# Altium PCB Analog_mic_breakout_rev2.PcbDoc
Units mm, origin at the board's own origin, x right, y up, seen from the top; angles counter-clockwise.
Board outline 4.11 x 9 mm, 2 copper layers (Top Layer, Bottom Layer); 6 components, 4 nets, 15 pads, 3 vias.
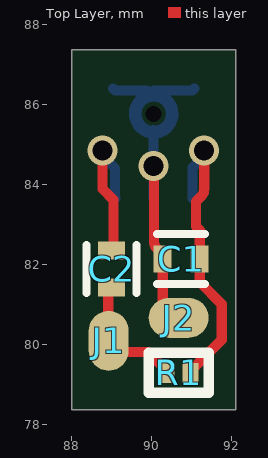
[diagram p0: Top Layer view]
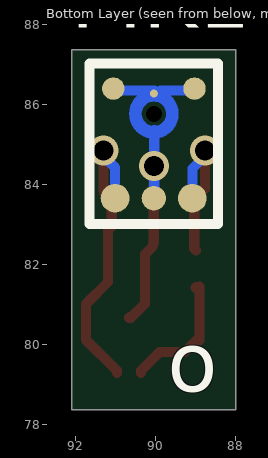
[diagram p1: Bottom Layer view, seen from below]
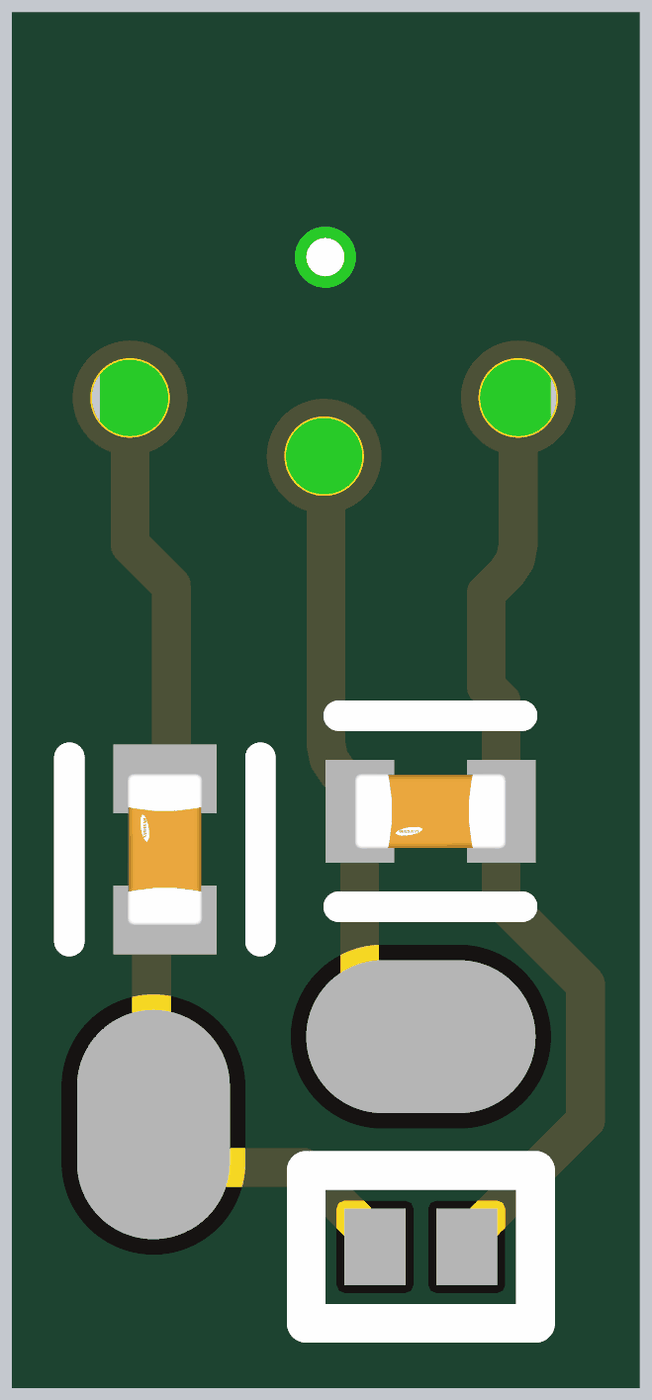
[diagram p2: 3D render of the assembled board from above, using the file's embedded part models]

## Layer stack, top to bottom
Top Solder: solder mask 0.0102, Solder Resist, Dk 3.5
Top Layer: signal copper 0.0356
Dielectric 1: dielectric 0.32, FR-4, Dk 4.8
Bottom Layer: signal copper 0.0356
Bottom Solder: solder mask 0.0102, Solder Resist, Dk 3.5

## Board outline
88.001,78.357 92.106,78.357 92.106,87.359 88.001,87.359

## Design rules (kind name [scope] priority, off if disabled: settings)
Clearance [All] p1: gap=0.254 ignorepadtopadclearanceinfootprint=FALSE except(0: Arc-Hole Track-Hole SMDPad-Hole THPad-Hole Via-Hole Fill-Hole Poly-Hole Region-Hole Text-Hole)
PolygonConnect [All] p1: connectstyle=Relief reliefconductorwidth=0.254 reliefentries=4 polygonreliefangle="90 Angle" airgapwidth=0.254
RoutingVias [All] p1: holewidth=0.711 width=1.27 viastyle="Through Hole" minholewidth=0.711 minwidth=1.27 maxholewidth=0.711 maxwidth=1.27
SolderMaskExpansion [All] p1: expansion=0.102 istentingtop=FALSE
Width [All] p1: maxlimit=0.254 minlimit=0.254 preferedwidth=0.254
30 further rules are at their usual default settings.

## Components (designator, comment, footprint, x,y, rotation, side; value= is the part's Value field where it differs from the comment)
C1 "CL05A106MP5NUNC" FP-CL05A106MP5NUNC-MFG 90.739,82.132 r180 top value=10uF
C2 "CL05A106MP5NUNC" FP-CL05A106MP5NUNC-MFG 89.001,81.882 r90 top value=10uF
J1 "Pad" Pad 88.926,80.082 r0 top
J2 "Pad" Pad 90.676,80.657 r270 top
MK1 "AMM-3738-B-R" 665-AMM-3738-B-R 90.051,85.757 r180 bottom
R1 "ERA-1AEB102C" 0603_SMD_Resistor 90.676,79.282 r0 top

## Footprints (in the part's own frame and the unit in brackets; to place one, negate y for a bottom-side part, rotate by r counter-clockwise, add the part's x,y. Pads: shape width x height; smd on the part's side, far side on the other; paste and mask are expansions set on the pad)
0603_SMD_Resistor [mm]
  rect 0.4x0.5 smd mask+0.052: 1(-0.3,0) 2(0.3,0)
  silkscreen extent -0.75,-0.5 0.75,0.5, body extent -0.34,-0.17 0.34,0.17, height 0.32
665-AMM-3738-B-R [mm] "Analog MEMS Microphone"
  round 0.72 smd: 1(0.96,-2.11) 4(-0.97,-2.11)
  round 0.56 smd mask+0.102: 2(1.015,0.63)
  round 0.56 smd: 3(-1.015,0.63)
  round 0.61 smd: 5(0,-2.11)
  round 0.2 smd: 6(0,0.508)
  Top Layer lines w0.315: 0.008,-0.462 cw(c0,0) -0.463,0 cw(c0,0) 0.008,-0.462
  silkscreen extent -1.61,-2.76 1.61,1.25, body extent -1.48,-2.63 1.47,1.13, height 1.11
FP-CL05A106MP5NUNC-MFG [mm]
  rect 0.45x0.675 smd paste+0 mask+0: 1(-0.463,0) 2(0.463,0)
  silkscreen extent -0.6,-0.63 0.6,0.63, body extent -0.79,-0.45 0.79,0.45, height 0.25
Pad [mm]
  oval 1x1.5 smd: 1(0,0)

## Part data
C1 C2: library part CMP-13271-000002-1, "CAP CER 10UF 10V X5R 0402", Capacitance=10uF, Manufacturer=Samsung, Temperature="-55°C to +85°C", Temperature Characteristic=X5R, Temperature Coefficient=15%, Temperature Range High=+85°C, Temperature Range Low=-55°C, Tolerance=20%, Voltage Rating=10V, Automotive=No, Category=Cap, ComponentLink2Description=Datasheet, ComponentLink2URL=http://www.samsungsem.com/kr/support/product-search/mlcc/__icsFiles/afieldfile/2019/05/10/19-CL05A106MP5NUNC.pdf, Device Class L1="Passive Components", Device Class L2=Capacitors, Device Class L3="Ceramic Capacitors", Digikey Description="CAP CER 10UF 10V X5R 0402", Height=0.7mm, Ipc Land Pattern Name=CAPC10050X50, Lead Free=Yes, Manufacturer Part Number=CL05A106MP5NUNC, Material=Ceramic, Octopart=https://octopart.com/cl05a106mp5nunc-samsung-22457395, Package=CL05A106MP5NUNC, RoHS=TRUE
MK1: Manufacturer="PUI Audio", Supplier Part Number 1=665-AMM-3738-B-R, Supplier 1=Mouser
R1: "0603 SMD 1K Res 0.1%", Supplier Part Number 1=P1.0KBXCT-ND, Supplier 1=Digi-Key

## Free pads (board coordinates)
  round 0.1 hole 0.4 unplated: 13(90.051,85.757)

## Via types
v1: diameter 0.75, hole 0.5, Top Layer to Bottom Layer, tented top, 3 vias

## Nets (pads, with @x,y where several pads share a name; then routed paths per layer and width w, separated by ;. In a path a pad name is that pad's centre, name@x,y a point inside that pad or via, vN(x,y) a via of type N, cw(c..) or ccw(c..) an arc to the next point about the centre after c; other vN are vias at no path point)
GND: C1.2 J2.1 MK1.2 MK1.3 MK1.5 MK1.6 | length 7.7
  Top Layer w0.254: v1(90.043,84.455) 90.045,84.448 cw(c89.801,84.377) 90.055,84.377 90.055,82.571 ccw(c90.309,82.571) 90.129,82.391 90.276,82.244 C1.2 90.276,81.009 90.628,80.657 J2.1
  Bottom Layer w0.254: MK1.2 89.085,86.338 89.884,86.338 ; 90.043,85.344 90.043,85.295 v1(90.043,84.455) 90.043,83.655 MK1.5 ; MK1.6@90.043,86.338 91.017,86.338 MK1.3
NetC1_1: C1.1 MK1.4 R1.2 | length 7.5
  Top Layer w0.254: R1.2 90.976,79.332 91.753,80.109 91.753,81 91.201,81.552 C1.1 91.201,82.85 91.104,82.947 91.104,83.56 91.239,83.694 ccw(c91.059,83.874) 91.313,83.874 v1(91.313,84.836)
  Bottom Layer w0.254: MK1.4 91.021,84.41 91.313,84.702 v1(91.313,84.836)
NetC2_1: C2.1 J1.1 R1.1 | length 3.1
  Top Layer w0.254: J1.1@88.914,80.095 C2.1@88.914,81.432 ; C2.1 C2.1@89.014,81.407 ; J1.1@89.014,80.069 89.026,80.057 89.282,79.801 89.907,79.801 90.376,79.332 R1.1
NetC2_2: C2.2 MK1.1 | length 3.9
  Top Layer w0.254: v1(88.773,84.836) 88.773,83.877 89.043,83.607 89.043,82.387 C2.2
  Bottom Layer w0.254: v1(88.773,84.836) 88.773,84.702 89.087,84.388 89.087,83.651 MK1.1

## Silkscreen, mask and mechanical layers (free items; w line width, h text height)
Bottom Overlay:
  text "o" at 88.451,78.807 h1.5
Mechanical 1:
  the board outline again, w0.254